# Altium PCB TelecarRemoteControlStc8051.PcbDoc
Units mil, origin at the board's own origin, x right, y up, seen from the top; angles counter-clockwise.
Board outline 6000 x 4000 mil, 2 copper layers (Top Layer, Bottom Layer); 33 components, 38 nets, 110 pads, 0 vias.
Unrouted connection lines stored in the file: 58.
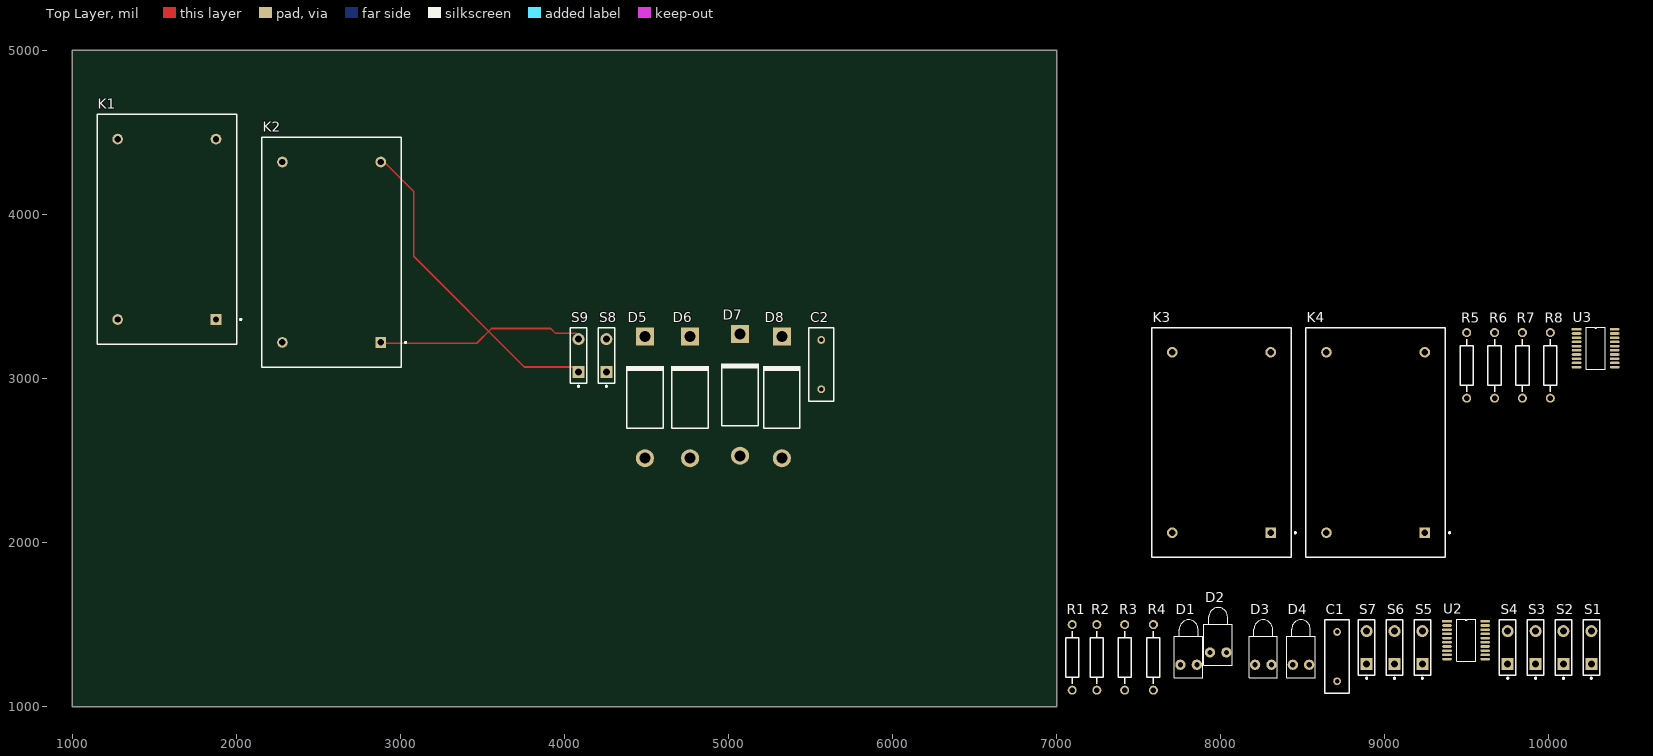
[diagram p0: Top Layer view]
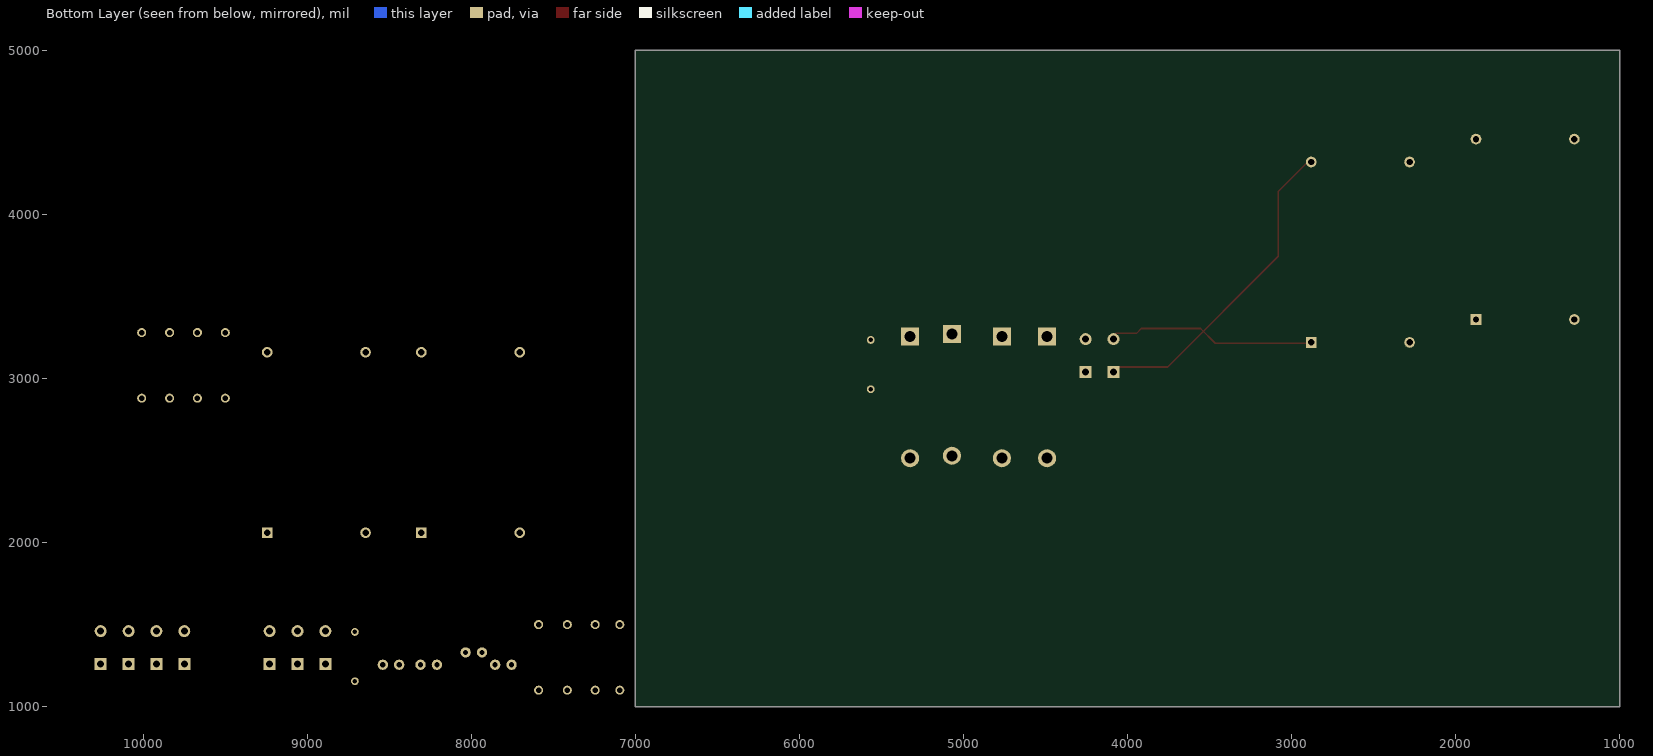
[diagram p1: Bottom Layer view, seen from below]

## Layer stack, top to bottom
Top Layer: signal copper 1.4
Dielectric: dielectric 12.6, FR-4, Dk 4.8
Bottom Layer: signal copper 1.4

## Board outline
1000,1000 7000,1000 7000,5000 1000,5000

## Design rules (kind name [scope] priority, off if disabled: settings)
Clearance [All] p1: gap=10
PolygonConnect [All] p1: connectstyle=Relief reliefconductorwidth=10 reliefentries=4 polygonreliefangle="90 Angle"
RoomDefinition TelecarRemoteControlStc8051 [InComponentClass('TelecarRemoteControlStc8051')] p1: confinementstyle=ConfineIn formatcopy=TRUE lockcomponents=FALSE outline 4025,1900 10445,1900 10445,3420 4025,3420
RoomDefinition TelecarMasterDriverStc8051 [InComponentClass('TelecarMasterDriverStc8051')] p2: confinementstyle=ConfineIn formatcopy=TRUE lockcomponents=FALSE outline 7045,1060 10320,1060 10320,1640 7045,1640
RoutingVias [All] p1: holewidth=28 width=50 viastyle="Through Hole" minholewidth=28 minwidth=50 maxholewidth=28 maxwidth=50
SilkscreenOverComponentPads [All] p1: minsilkscreentomaskgap=10
SolderMaskExpansion [All] p1: expansion=4
Width [All] p1: maxlimit=10 minlimit=10 preferedwidth=10
27 further rules are at their usual default settings.

## Classes and differential pairs
component class TelecarRemoteControlStc8051: C2 D5 D6 D7 D8 K1 K2 K3 K4 Q1 Q2 Q3 Q4 R5 R6 R7 R8 S8 S9 U3 U4
component class TelecarMasterDriverStc8051: C1 D1 D2 D3 D4 R1 R2 R3 R4 S1 S2 S3 S4 S5 S6 S7 U1 U2

## Components (designator, comment, footprint, x,y, rotation, side; value= is the part's Value field where it differs from the comment)
C1 "Cap" RAD-0.3 8710,1305 r90 top
C2 "Cap" RAD-0.3 5565,3085 r90 top
D1 "LED F" LED-1 7805,1255 r90 top
D2 "LED M" LED-1 7985,1330 r90 top
D3 "LED L" LED-1 8260,1255 r90 top
D4 "LED Frequency" LED-1 8490,1255 r90 top
D5 "Diode 1N5408" DIO18.84-9.6x5.6 4490,2885 r90 top
D6 "Diode 1N5408" DIO18.84-9.6x5.6 4765,2885 r90 top
D7 "Diode 1N5408" DIO18.84-9.6x5.6 5070,2900 r90 top
D8 "Diode 1N5408" DIO18.84-9.6x5.6 5325,2885 r90 top
K1 "Relay-SPST" DIP-P4 1575,3910 r90 top
K2 "Relay-SPST" DIP-P4 2580,3770 r90 top
K3 "Relay-SPST" DIP-P4 8005,2610 r90 top
K4 "Relay-SPST" DIP-P4 8945,2610 r90 top
R1 "Res2" AXIAL-0.4 7095,1300 r90 top
R2 "Res2" AXIAL-0.4 7245,1300 r90 top
R3 "Res2" AXIAL-0.4 7415,1300 r90 top
R4 "Res2" AXIAL-0.4 7590,1300 r90 top
R5 "Res2" AXIAL-0.4 9500,3080 r90 top
R6 "Res2" AXIAL-0.4 9670,3080 r90 top
R7 "Res2" AXIAL-0.4 9840,3080 r90 top
R8 "Res2" AXIAL-0.4 10010,3080 r90 top
S1 "SW-PB" SPST-2 10260,1360 r90 top
S2 "SW-PB" SPST-2 10090,1360 r90 top
S3 "SW-PB" SPST-2 9920,1360 r90 top
S4 "SW-PB" SPST-2 9750,1360 r90 top
S5 "SW-PB" SPST-2 9230,1360 r90 top
S6 "SW-PB" SPST-2 9060,1360 r90 top
S7 "SW-PB" SPST-2 8890,1360 r90 top
S8 "SW-PB" SPST-2 4255,3140 r90 top
S9 "SW-PB" SPST-2 4085,3140 r90 top
U2 "STC15W401AS_SOP20_DIP20 _TSSOP20" TSSOP20 9380,1520 r0 top
U3 "STC15W401AS_SOP20_DIP20 _TSSOP20" TSSOP20 10170,3300 r0 top

## Footprints (in the part's own frame and the unit in brackets; to place one, negate y for a bottom-side part, rotate by r counter-clockwise, add the part's x,y. Pads: shape width x height; smd on the part's side, far side on the other; paste and mask are expansions set on the pad)
AXIAL-0.4 [mm] "Axial Device, Thru-Hole; 2 Leads; 0.4 in Pin Spacing"
  round 1.4 hole 0.85: 1(-5.08,0) 2(5.08,0)
  silkscreen extent -4.06,-1.02 4.06,1.02
DIO18.84-9.6x5.6 [mm] "Diode, Axial; Body 9.5 x 5.6 mm (LxDia. max), Lead Dia. 1.32 mm (max)"
  round 2.8 hole 1.7: 1(-9.42,0)
  rect 2.8x2.8 hole 1.7: 2(9.42,0)
  silkscreen extent -4.8,-2.8 4.9,2.8
DIP-P4 [mm] "DIP; 4 Round Pins; Row Space 27.94 mm; Pitch 15.24 mm"
  rect 1.65x1.65 hole 1: 1(-13.97,-7.62)
  round 1.65 hole 1: 2(-13.97,7.62) 3(13.97,-7.62) 4(13.97,7.62)
  silkscreen extent -17.8,-11.58 17.8,10.8, body extent -17.8,-10.8 17.8,10.8, height 14
LED-1 [mm] "Typical RED GaAs LED; 2 Leads"
  round 1.6 hole 0.8: 1(0,1.27) 2(0,-1.27)
  silkscreen extent -2,-2.2 6.95,2.2
RAD-0.3 [mm] "Radial Cap, Thru-Hole; 2 Leads; 0.3 in Pin Spacing"
  round 1.2 hole 0.7: 1(-3.81,0) 2(3.81,0)
  silkscreen extent -5.71,-1.91 5.71,1.91
SPST-2 [mm] "Circuit Breaker; 2 Leads"
  rect 1.85x1.85 hole 1.1: 1(-2.54,0)
  round 1.85 hole 1.1: 2(2.54,0)
  silkscreen extent -4.89,-1.27 4.28,1.27
TSSOP20 [mm]
  rect 1.5x0.4 smd: 1(0,0)
  oval 1.5x0.4 smd: 2(0,-0.65) 3(0,-1.3) 4(0,-1.95) 5(0,-2.6) 6(0,-3.25) 7(0,-3.9) 8(0,-4.55) 9(0,-5.2) 10(0,-5.85) 11(5.9,-5.85) 12(5.9,-5.2) 13(5.9,-4.55) 14(5.9,-3.9) 15(5.9,-3.25) 16(5.9,-2.6) 17(5.9,-1.95) 18(5.9,-1.3) 19(5.9,-0.65) 20(5.9,0)
  silkscreen extent 1.48,-6.18 4.42,0.33

## Part data
C1 C2: "Capacitor"
D1 D2 D3 D4: library part LED1, "Typical RED GaAs LED"
D5 D6 D7 D8: "3 Amp Medium Power Silicon Rectifier Diode"
K1 K2 K3 K4: "Single-Pole Single-Throw Relay"
R1 R2 R3 R4 R5 R6 R7 R8: "Resistor"
S1 S2 S3 S4 S5 S6 S7 S8 S9: "Switch"

## Nets (pads, with @x,y where several pads share a name; then routed paths per layer and width w, separated by ;. In a path a pad name is that pad's centre, name@x,y a point inside that pad or via, vN(x,y) a via of type N, cw(c..) or ccw(c..) an arc to the next point about the centre after c; other vN are vias at no path point)
GND: C1.1 C2.1 D5.1 D6.1 D7.1 D8.1 K1.4 K2.4 K3.4 K4.4 S1.1 S2.1 S3.1 S4.1 S5.1 S6.1 S7.1 S8.1 S9.1 U2.10 U3.10
IN1: S8.2 U3.15
IN2: S9.2 U3.14
KEY1: S1.2 U2.20
KEY2: S2.2 U2.19
KEY3: S3.2 U2.18
KEY4: S4.2 U2.17
KEY5: S5.2 U2.16
KEY6: S6.2 U2.15
KEY7: S7.2 U2.14
LEDF: D1.2 U2.11
LEDFREQUENCY: D4.2 U2.9
LEDL: D3.2 U2.5
LEDM: D2.2 U2.6
"LT8910 CLK": U2.4 U3.4
"LT8910 MISO": U2.3 U3.3
"LT8910 MOSI": U2.2 U3.2
"LT8910 NSS": U2.1 U3.1
"LT8910 PKT": U2.13 U3.13
"LT8910 RESET": U2.12 U3.12
NetD1_1: D1.1 R1.2
NetD2_1: D2.1 R2.2
NetD3_1: D3.1 R3.2
NetD4_1: D4.1 R4.2
NetD5_2: D5.2 K1.3
NetD6_2: D6.2 K2.3
NetD7_2: D7.2 K3.3
NetD8_2: D8.2 K4.3
NetQ1_2: R5.1
NetQ2_2: R6.1
NetQ3_2: R7.1
NetQ4_2: R8.1
OUT1: R5.2 U3.19
OUT2: R6.2 U3.18
OUT3: R7.2 U3.17
OUT4: R8.2 U3.16
PWM: U3.20
VCC: C1.2 C2.2 R1.1 R2.1 R3.1 R4.1 U2.8 U3.8
pads on no net: K1.1 K1.2 K2.1 K2.2 K3.1 K3.2 K4.1 K4.2 U2.7 U3.5 U3.6 U3.7 U3.9 U3.11
copper on no net: | length 3233
  Top Layer w10: 2890,3215 3465,3215 3555,3305 3915,3305 3945,3275 4070,3275 4070,3250 ; 2890,4330 3080,4140 3080,3745 3755,3070 4115,3070